# Altium PCB PCB2.PcbDoc
Units mil, origin at the board's own origin, x right, y up, seen from the top; angles counter-clockwise.
Board outline 6000 x 4000 mil, 2 copper layers (Top Layer, Bottom Layer); 73 components, 37 nets, 188 pads, 24 vias.
Unrouted connection lines stored in the file: 137.
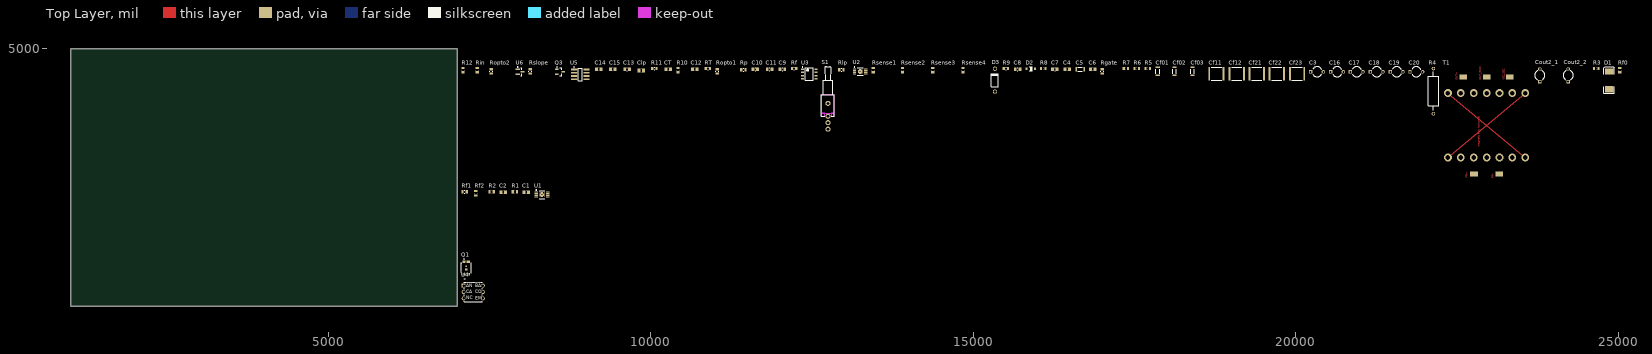
[diagram p0: Top Layer view]
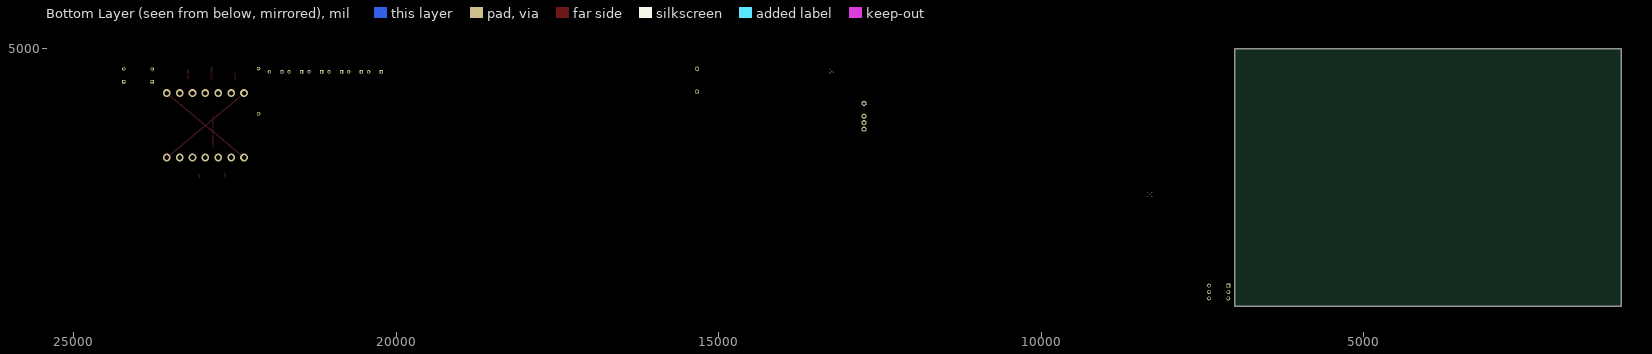
[diagram p1: Bottom Layer view, seen from below]

## Layer stack, top to bottom
Top Solder: solder mask 0.4, Solder Resist, Dk 3.5
Top Layer: signal copper 1.4
Dielectric 1: dielectric 12.6, FR-4, Dk 4.8
Bottom Layer: signal copper 1.4
Bottom Solder: solder mask 0.4, Solder Resist, Dk 3.5

## Board outline
1000,1000 7000,1000 7000,5000 1000,5000

## Design rules (kind name [scope] priority, off if disabled: settings)
Clearance [All] p1: gap=10 ignorepadtopadclearanceinfootprint=FALSE except(0: Arc-Hole Track-Hole SMDPad-Hole THPad-Hole Via-Hole Fill-Hole Poly-Hole Region-Hole Text-Hole)
PolygonConnect [All] p1: connectstyle=Relief reliefconductorwidth=10 reliefentries=4 polygonreliefangle="90 Angle" airgapwidth=10
RoutingVias [All] p1: holewidth=28 width=50 viastyle="Through Hole" minholewidth=28 minwidth=50 maxholewidth=28 maxwidth=50
SolderMaskExpansion [All] p1: expansion=4
Width [All] p1: maxlimit=10 minlimit=10 preferedwidth=10
30 further rules are at their usual default settings.

## Components (designator, comment, footprint, x,y, rotation, side; value= is the part's Value field where it differs from the comment)
C1 "10nF" CAPC0805(2012)145_N 8065,2770 r0 top value=82nF
C2 "100nF" CAPC0805(2012)145_N 7710,2770 r0 top value=82nF
C3 "Cap2" CAPR5-4X5 20330,4640 r0 top value=56uF
C4 "100nF" CAPC0805(2012)145_N 16455,4680 r0 top value=82nF
C5 "1uF" CAPC3216X180X20LL20 16655,4680 r0 top
C6 "100nF" CAPC0805(2012)145_N 16850,4680 r0 top value=82nF
C7 "10nF" CAPC0805(2012)145_N 16265,4680 r0 top value=82nF
C8 "22nF" CAPC0805(2012)145_N 15685,4680 r0 top value=82nF
C9 "100pF" CAPC0805(2012)145_N 12040,4680 r0 top value=82nF
C10 "100nF" CAPC0805(2012)145_N 11620,4680 r0 top value=82nF
C11 "100nF" CAPC0805(2012)145_N 11840,4680 r0 top value=82nF
C12 "20nF" CAPC0805(2012)145_N 10680,4680 r0 top value=82nF
C13 "100nF" CAPC0805(2012)145_N 9630,4680 r0 top value=82nF
C14 "10uF" CAPC0805(2012)145_N 9190,4680 r0 top value=82nF
C15 "100nF" CAPC0805(2012)145_N 9410,4680 r0 top value=82nF
C16 "Cap2" CAPR5-4X5 20640,4640 r0 top value=56uF
C17 "Cap2" CAPR5-4X5 20945,4640 r0 top value=56uF
C18 "Cap2" CAPR5-4X5 21255,4640 r0 top value=56uF
C19 "Cap2" CAPR5-4X5 21565,4640 r0 top value=56uF
C20 "Cap2" CAPR5-4X5 21870,4640 r0 top value=56uF
Cf01 "1uF" CAPC3216X180X20LL20 17860,4645 r90 top
Cf02 "1uF" CAPC3216X180X20LL20 18120,4645 r90 top
Cf03 "1uF" CAPC3216X180X20LL20 18400,4645 r90 top
Cf11 "10uF" CAPC5750X250X20LL40 18770,4610 r0 top
Cf12 "10uF" CAPC5750X250X20LL40 19085,4610 r0 top
Cf21 "10uF" CAPC5750X250X20LL40 19395,4610 r0 top
Cf22 "10uF" CAPC5750X250X20LL40 19705,4610 r0 top
Cf23 "10uF" CAPC5750X250X20LL40 20020,4610 r0 top
Clp "50pF" CAPC0805(2012)145_N 9850,4660 r0 top value=82nF
Cout2_1 "Cap2" CAPR5-4X5 23785,4585 r90 top value=56uF
Cout2_2 "" CAPR5-4X5 24225,4585 r90 top value=56uF
CT "17.2nF" CAPC0805(2012)145_N 10270,4680 r0 top value=82nF
D1 "CDBB5100" SMC 24860,4505 r90 top
D2 "1N4148W" JSCJ-SOD-123-2_V 15890,4685 r0 top
D3 "11 V" FAIR-DO-41-2_V 15335,4510 r90 top
Q1 "BSF450NE7NH3" INF-MG-WDSON-2-1_V 7135,1600 r0 top
Q3 "2N7002" INF-PG-SOT23_M 8590,4640 r0 top
R1 "30k" RESC0805(2012)_L 7890,2780 r0 top value="100000.00 Ohm"
R2 "2k29" RESC0805(2012)_L 7530,2780 r0 top value="100000.00 Ohm"
R3 "800k" RESC0805(2012)_L 24660,4690 r0 top value="100000.00 Ohm"
R4 "300k" AXIAL-0.7 22135,4340 r90 top value=50K
R5 "33k" RESC0805(2012)_L 17705,4690 r0 top value="100000.00 Ohm"
R6 "3M" RESC0805(2012)_L 17535,4690 r0 top value="100000.00 Ohm"
R7 "5k69" RESC0805(2012)_L 17365,4690 r0 top value="100000.00 Ohm"
R8 "30k" RESC0805(2012)_L 16085,4690 r0 top value="100000.00 Ohm"
R9 "1M" RESC0805(2012)_L 15505,4690 r0 top value="100000.00 Ohm"
R10 "160k" RESC0805(2012)_L 10420,4665 r90 top value="100000.00 Ohm"
R11 "30k" RESC0805(2012)_L 10055,4690 r0 top value="100000.00 Ohm"
R12 "423R" RESC0805(2012)_L 7085,4665 r90 top value="100000.00 Ohm"
Rf "50k" RESC0805(2012)_L 12220,4690 r0 top value="100000.00 Ohm"
Rf0 "6R4" RESC0805(2012)_L 25025,4665 r90 top value="6.4 Ohm"
Rf1 "2R" RESC0805(2012)_L 7110,2780 r0 top value="100000.00 Ohm"
Rf2 "870m" RESC0805(2012)_L 7285,2755 r90 top value="100000.00 Ohm"
Rgate "10R" RESC0805(2012)_L 17000,4645 r90 top value="100000.00 Ohm"
Rin "50k" RESC0805(2012)_L 7305,4665 r90 top value="100000.00 Ohm"
Rlp "10k" RESC0805(2012)_L 12955,4670 r0 top value="100000.00 Ohm"
Ropto1 "10k" RESC0805(2012)_L 11030,4645 r90 top value="100000.00 Ohm"
Ropto2 "10k" RESC0805(2012)_L 7525,4645 r90 top value="100000.00 Ohm"
Rp "Not Populated" RESC0805(2012)_L 11435,4670 r0 top value="100000.00 Ohm"
Rsense1 "200m" RESC0805(2012)_L 13450,4665 r90 top value="100000.00 Ohm"
Rsense2 "200m" RESC0805(2012)_L 13900,4665 r90 top value="100000.00 Ohm"
Rsense3 "200m" RESC0805(2012)_L 14370,4665 r90 top value="100000.00 Ohm"
Rsense4 "200m" RESC0805(2012)_L 14840,4665 r90 top value="100000.00 Ohm"
Rslope "24.3k" RESC0805(2012)_L 8130,4645 r90 top value="100000.00 Ohm"
RT "1k" RESC0805(2012)_L 10885,4690 r0 top value="100000.00 Ohm"
S1 "SW-SPDT" TL36WW15050 12745,3950 r90 top
T1 "ETD 29/16/10, Turns ratio 30:13:22" "ETD 29/16/10 v2" 22960,3810 r0 top
U1 "Lin v.reg TPS79801-Q1" DGN0008B_N 8310,2735 r0 top
U2 "Lin v.reg TPS79801-Q1" DGN0008B_N 13245,4645 r0 top
U3 "UC3842AD8TR" D0008A_L 12455,4605 r0 top
U4 "4N35(SHORT)" 4N35 7395,1125 r0 top value=Value
U5 "LM293D" D0008A_M 8905,4600 r0 top
U6 "TLVH431IDBZT" TI-DBZ3_N 7970,4640 r0 top

## Footprints (in the part's own frame and the unit in brackets; to place one, negate y for a bottom-side part, rotate by r counter-clockwise, add the part's x,y. Pads: shape width x height; smd on the part's side, far side on the other; paste and mask are expansions set on the pad)
4N35 [mil]
  rect 59x59 / inner round 60 / far side rect 59x59 hole 39 paste+0 mask+0: 1(-300,200)
  round 59 / inner round 60 / far side round 59 hole 39 paste+0 mask+0: 2(-300,100) 3(-300,0) 4(0,0) 5(0,100) 6(0,200)
  silkscreen extent -286,-50 -14,250, body extent 0,0 10,10, height 10
AXIAL-0.7 [mm] "Axial Device, Thru-Hole; 2 Leads; 0.7 in Pin Spacing"
  round 1.4 hole 0.85: 1(-8.89,0) 2(8.89,0)
  silkscreen extent -7.62,-2.03 7.62,2.03
CAPC0805(2012)145_N [mm] "Chip Capacitor, Body 2.0x1.2mm, Height 1.45mm, IPC Medium Density"
  rect 1.15x1.45 smd: 1(-0.9,0) 2(0.9,0)
  silkscreen extent -0.05,-0.62 0.05,0.63, body extent -1.1,-0.72 1.1,0.73, height 1.45
CAPC3216X180X20LL20 [mm] "Chip Capacitor, 2-Leads, Body 3.40x1.80mm, IPC High Density"
  rect 0.55x1.7 smd: 1(-1.575,0) 2(1.575,0)
  silkscreen extent -0.9,-0.75 0.9,0.75, body extent -1.7,-0.9 1.7,0.9, height 1.8
CAPC5750X250X20LL40 [mm] "Chip Capacitor, 2-Leads, Body 6.1x5.4mm, IPC High Density"
  rect 0.75x5.3 smd: 1(-2.825,0) 2(2.825,0)
  silkscreen extent -2.05,-2.55 2.05,2.55, body extent -3.05,-2.7 3.05,2.7, height 2.5
CAPR5-4X5 [mm] "Capacitor; 2 Leads"
  rect 1.35x1.35 hole 0.8: 1(-2.5,0)
  round 1.35 hole 0.8: 2(2.5,0)
  silkscreen extent -1.69,-2 1.82,2
D0008A_L [mm] "SOIC, 8-Leads, Body 5x4mm, Pitch 1.27mm, IPC High Density"
  rrect18% 1.25x0.55 smd: 1(-2.625,1.905) 2(-2.625,0.635) 3(-2.625,-0.635) 4(-2.625,-1.905) 5(2.625,-1.905) 6(2.625,-0.635) 7(2.625,0.635) 8(2.625,1.905)
  silkscreen extent -2.75,-2.5 1.6,2.85, body extent -3,-2.45 3,2.45, height 1.63
D0008A_M [mm] "SOIC, 8-Leads, Body 5x4mm, Pitch 1.27mm, IPC Low Density"
  oval 2.5x0.7 smd: 1(-2.45,1.905) 2(-2.45,0.635) 3(-2.45,-0.635) 4(-2.45,-1.905) 5(2.45,-1.905) 6(2.45,-0.635) 7(2.45,0.635) 8(2.45,1.905)
  silkscreen extent -2.57,-2.5 0.8,2.93, body extent -2,-2.5 2,2.5, height 1.75
DGN0008B_N [mm] "TSOP, 8-Leads, Body 3.1x3.1mm, Pitch 0.65mm, Thermal Pad 1.98x1.88mm, IPC Medium Density"
  rrect22% 1.35x0.45 smd: 1(-2.225,0.975) 2(-2.225,0.325) 3(-2.225,-0.325) 4(-2.225,-0.975) 5(2.225,-0.975) 6(2.225,-0.325) 7(2.225,0.325) 8(2.225,0.975)
  rrect5% 1.88x1.98 smd: 9(0,0)
  silkscreen extent -2.35,-1.55 1.15,1.9, body extent -2.45,-1.5 2.45,1.5, height 0.94
"ETD 29/16/10 v2" [mm]
  rect 3x2 smd: 1(-5,-19.111) 2(5,-19.111) 4(-9.144,19.05) 5(0,19.05) 6(9.144,19.05)
  rect 1x1 smd paste+0 mask+0.102: 3(-0.635,19.05)
  Top Layer lines w0.05: -15.24,-12.7 15.24,12.7 ; -15.24,12.7 15.24,-12.7
  body extent -17.6,-17.5 17.6,17.6, height 25
FAIR-DO-41-2_V [mm] "2-Leads, Axial leaded, Body 2.72x5.2mm, Pin Spacing 9mm"
  round 1.65 hole 1.15: 1(-4.5,0) 2(4.5,0)
  silkscreen extent -2.6,-1.36 2.6,1.36, body extent -4.93,-1.36 4.93,1.36, height 2.71
INF-MG-WDSON-2-1_V [mm] "WDSON, 6-Leads, Body 4.015x3.825mm"
  rect 1.25x0.9 smd: 1(-0.825,2.41) 2(0.825,2.41) 3(0.825,-2.505) 4(-0.825,-2.505)
  rect 0.65x0.65 smd: 5(0,0.65)
  rect 0.9x0.7 smd: 6(0,-0.675)
  silkscreen extent -1.91,-2.01 1.91,3.53, body extent -1.91,-2.01 1.91,2.01, height 0.7
INF-PG-SOT23_M [mm] "SOT23, 3-Leads, Body 2.9x1.3mm, Pitch 0.95mm, IPC Low Density"
  rect 1.35x0.6 smd: 1(-1.2,0.95) 2(-1.2,-0.95) 3(1.2,0)
  silkscreen extent -1.32,-1.5 0.7,1.92, body extent -0.7,-1.5 0.7,1.5, height 1.1
JSCJ-SOD-123-2_V [mm] "SMD, 2-Leads, Body 2.7x1.6mm, Height 1.25mm"
  rect 0.8x1 smd: 1(-1.62,0) 2(1.62,0)
  silkscreen extent -0.5,-0.8 0.6,0.8, body extent -1.35,-0.8 1.35,0.8, height 1.25
RESC0805(2012)_L [mm] "Chip Resistor, Body 2.0x1.3mm, IPC High Density"
  rect 0.85x1.3 smd: 1(-0.85,0) 2(0.85,0)
  silkscreen extent -0.05,-0.55 0.05,0.55, body extent -1.1,-0.67 1.1,0.68, height 0.7
SMC [mm] "DO-214-AB/SMC; 2 C-Bend Leads; Body 7.9 x 5.9 mm, inc. leads (LxW)"
  rect 2.4x3.3 smd: 1(-3.475,0) 2(3.475,0)
  silkscreen extent -5.07,-2.05 5.43,2.05
TI-DBZ3_N [mm] "SOT23, 3-Leads, Body 2.92x1.3 mm, Pitch 0.95 mm, IPC Medium Density"
  rect 1.6x0.6 smd: 1(-0.9,0.95) 2(-0.9,-0.95) 3(0.9,0)
  silkscreen extent -1.02,-1.5 0.7,1.92, body extent -0.7,-1.52 0.7,1.52, height 1.12
TL36WW15050 [mm] "Switch; 4 Leads"
  round 2 hole 1.1: 1(0,0) 2(-2.54,0) 3(-5.08,0) M(5.08,0)
  Top Layer keep-out region: 0,-1.27 0,-2.54 1.27,-2.54 1.27,-1.27
  Top Layer keep-out region: 0,2.54 0,1.27 1.27,1.27 1.27,2.54
  Top Layer keep-out region: 1.27,2.54 1.27,-2.54 8.509,-2.54 8.509,2.54
  silkscreen extent 0,-2.54 19.56,2.54

## Part data
C1 C2 C14 C15: library part CMP-1036-04379-1, "CAP 82nF", Case-EIA=0805, Case-Metric=2012, Rated Voltage="50 V", Tolerance=±10%, Max Thickness="1.45 mm", Technology=SMT
C3 C16 C17 C18 C19 C20 Cout2_1: "Capacitor", Voltage - Rated="50 V", PackageDescription="Capacitor; 2 Leads", PackageReference=CAPR5-4X5, Published=23-Sep-2002, Publisher="Altium Limited"
C4: library part CMP-1036-04379-1, "footprint not correct", Case-EIA=0805, Case-Metric=2012, Rated Voltage=100V, Tolerance=±10%, Max Thickness="1.45 mm", Technology=SMT
C5 Cf01 Cf02 Cf03: library part CMP-2000-06049-1, "Chip Capacitor, 1 uF, +/- 10%, 100 V, -55 to 125 degC, 1206 (3216 Metric), RoHS, Tape and Reel", Capacitance=1µF, Manufacturer=TDK, Operating Temperature=-55°C~125°C, Package / Case=1206(3216Metric), Package Description="2-Pin Surface Mount Device, Body 3.2 x 1.6 mm", Package Reference=1206, PCN Part Number=MLCCPartNumberChange30/Nov/2012, Ratings=-, Standard Package=1, Temperature Coefficient=X7R, Tolerance=±10%, Voltage - Rated=100V, Applications=GeneralPurpose, Catalog Drawings=CSERIES_1206_1.8, Category=Capacitors, Datasheet URL=http://www.farnell.com/datasheets/1484596.pdf, Datasheet Version=08/2011, Family=CeramicCapacitors, Featured Product=C-SeriesMidVoltageMLCCs, Features=-, Height - Seated (Max)=-, Kits=SAMPLEKIT1008-ND-KITCAPCERMLCC100V-630V, Lead Spacing=-, Lead Style=-, Manufacturer URL=http://www.tdk.com/, Mounting Technology=SurfaceMount, Mounting Type=SurfaceMount,MLCC, Online Catalog=CSeries,MidVoltage, Other Names=445-4467-1, Package URL=https://product.tdk.com/info/en/documents/chara_sheet/C3216X7R1V106K160AC.pdf, Packaging=CutTape(CT), Product Training Modules=SEAT,CCV,andTVCLDesignToolsGuidetoReplacinganElectrolyticCapacitorwithanMLCC, RoHS Information=RoHSCertificate-MLCC, Series=C
C6 C9 C10 C11 C12: library part CMP-1036-04379-1, "CAP 82nF", Case-EIA=0805, Case-Metric=2012, Rated Voltage="30 V", Tolerance=±10%, Max Thickness="1.45 mm", Technology=SMT
C7 CT: library part CMP-1036-04379-1, "CAP 82nF", Case-EIA=0805, Case-Metric=2012, Rated Voltage=30V, Tolerance=±10%, Max Thickness="1.45 mm", Technology=SMT
C8: library part CMP-1036-04379-1, "CAP 82nF", Case-EIA=0805, Case-Metric=2012, Rated Voltage=50V, Tolerance=±10%, Max Thickness="1.45 mm", Technology=SMT
C13 Clp: library part CMP-1036-04379-1, "CAP 82nF", Case-EIA=0805, Case-Metric=2012, Rated Voltage=15V, Tolerance=±10%, Max Thickness="1.45 mm", Technology=SMT
Cf11 Cf12 Cf21 Cf22 Cf23: library part CMP-2000-07445-1, "Chip Capacitor, 10 uF, +/- 10%, 100 V, -55 to 125 degC, 2220 (5750 Metric), RoHS, Tape and Reel", Manufacturer=TDK, Package Description="2-Pin Surface Mount Device, Body 5.7 x 5 mm", Package Reference=2220, Voltage - Rated=100V, Datasheet URL=https://product.tdk.com/info/en/catalog/datasheets/mlcc_automotive_midvoltage_en.pdf, Datasheet Version=03/2015, Manufacturer URL=http://www.tdk.com/, Mounting Technology=SurfaceMount
Cout2_2: library part Cap2, "Capacitor", Voltage - Rated="50 V", PackageDescription="Capacitor; 2 Leads", PackageReference=CAPR5-4X5, Published=23-Sep-2002, Publisher="Altium Limited"
D1: library part Diode, "Default Diode", Code_JEDEC=DO-214-AB, LatestRevisionDate=17-Jul-2002, LatestRevisionNote="Re-released for DXP Platform.", PackageDescription="DO-214-AB/SMC; 2 C-Bend Leads; Body 7.9 x 5.9 mm, inc. leads (LxW)", PackageReference=SMC, PackageVersion=Sep-1996, Published=8-Jun-2000, Publisher="Altium Limited"
D2: library part CMP-0914-00001-1, "Fast Switching Diode, 75 V, 150 mA, 2-Pin 2.7 x 1.6 x 1.25 mm SMD, Tape and Reel", Manufacturer="Changjiang Electronics", ComponentLink1Description="Manufacturer URL", ComponentLink1URL=http://www.cj-elec.com/, ComponentLink2Description=Datasheet, ComponentLink2URL=http://www.cj-elec.com/txUpfile/20121613352740313.pdf, ComponentLink3Description="Package Specification", ComponentLink3URL=http://www.cj-elec.com/txUpfile/201412112231195145.pdf, DatasheetVersion="Rev. A", IO (mA)=150, IR (uA)=1, Mounting Technology="Surface Mount", PackageDescription="2-Pin SMD, Body 2.7 x 1.6 mm, Height 1.25 mm", PackageReference=SOD-123-2, PackageVersion="Rev. A", Packing="Tape and Reel", PartNumber=1N4148W, PD (mW)=350, Trr (ns)=4, TSTG (degC)="-55 to 150", VF (V)=1.25, VR (V)=75
D3: library part CMP-0892-00002-1, "Zener Diode, 11V, 1W, 5%, -65 to 200 degC, 2-Pin DO-41, Body 2.72 x 5.2 mm, RoHS", Manufacturer="Fairchild Semiconductor", Operating and Storage Temperature Range="-65 to 200 degC", PartNumber=1N4741A, Test Current IZ (mA)=23, Tolerance=5%, ComponentLink1Description="Manufacturer URL", ComponentLink1URL=http://www.fairchildsemi.com/, ComponentLink2Description=Datasheet, ComponentLink2URL=http://www.fairchildsemi.com/ds/1N/1N4744A.pdf, ComponentLink3Description="Package Specification", ComponentLink3URL=http://www.fairchildsemi.com/dwg/DO/DO41A.pdf, DatasheetVersion="Rev. H3", IR (uA)=5, Mounting Technology="Through Hole", PackageDescription="2-Pin Axial leaded, Body 2.72 x 5.2 mm, Lead Spread 25.4 mm", PackageReference=DO-41-2, PackageVersion="Rev. 2", PD (W)=1, RoHS=TRUE, VZ (Max.) (V)=11.55, VZ (Min.) (V)=10.45, ZZ (Max) (ohm)=7
Q1: library part CMP-1091-00001-1, "N-Channel OptiMOS 3 Power-MOSFET, 75 V VDS, 15 A ID, -40 to 150 degC, MG-WDSON-2-1, Reel, Green", Manufacturer=Infineon, ComponentLink1Description="Manufacturer URL", ComponentLink1URL=http://www.infineon.com/, ComponentLink2Description=Datasheet, ComponentLink2URL=http://www.infineon.com/dgdl/BSF450NE7NH3G_rev2.pdf?folderId=db3a304313b8b5a60113cee8763b02d7&fileId=db3a30433a047ba0013a687e2ae403da, ComponentLink3Description="Package Specification", ComponentLink3URL=http://www.infineon.com/dgdl/BSF450NE7NH3G_rev2.0.pdf?folderId=db3a304313b8b5a60113cee8763b02d7&fileId=db3a30433a047ba0013a687e2ae403da, DatasheetVersion="Rev. 2.0", Green=TRUE, Halogen-free=TRUE, ID (max)="15 A", IDpuls (max)="60 A", Mounting Technology="Surface Mount", PackageDescription="6-Pin Metal Green Very Very Thin Profile Dual Small Outline Non-Leaded Package", PackageReference=MG-WDSON-2-1, PackageVersion="Rev. 02, 05/2009", Packing=Reel, PartNumber=BSF450NE7NH3, Polarity=N, Ptot (max)="18 W", QG="6 nC", RDS (on) (max)="45 mOhm", Rth="7 K/W", RthJA (max)="58 K/W", RthJC (max)="7 K/W", VDS (max)="75 V", VGS(th) (max)="3.5 V", VGS(th) (min)="2.3 V"
Q3: library part CMP-1149-00026-1, "N-Channel OptiMOS Small-Signal-Transistor, 60 V VDS, 0.3 A ID, -55 to 150 degC, PG-SOT23, Reel, Green", Manufacturer=Infineon, ComponentLink1Description="Manufacturer URL", ComponentLink1URL=http://www.infineon.com/, ComponentLink2Description=Datasheet, ComponentLink2URL=http://www.infineon.com/dgdl/2N7002_Rev2.4.pdf?folderId=db3a3043156fd573011622e10b5c1f67&fileId=db3a304319bc939a0119c2a9461e79e6, ComponentLink3Description="Package Specification", ComponentLink3URL=http://www.infineon.com/dgdl/SOT23-Package_Overview.pdf?folderId=db3a30431936bc4b0119532290053c66&fileId=db3a30431936bc4b0119533468123c85, DatasheetVersion="Rev. 2.4", Green=TRUE, Halogen-free=TRUE, ID (max)="0.3 A", IDpuls (max)="1.2 A", Mounting Technology="Surface Mount", PackageDescription="3-Pin Small Outline Transistor Package, 2.9 x 1.3 mm Body, 0.95 mm Pitch", PackageReference=PG-SOT23, PackageVersion=Apr-08, Packing=Reel, PartNumber=2N7002, Ptot (max)="0.5 W", QG="0.4 nC", RDS (on) (max)="3,000 mOhm", RDS (on) (max) (@4.5V)="4,000 mOhm", RthJA (max)="250 K/W", VDS (max)="60 V", VGS(th) (max)="2.5 V", VGS(th) (min)="1.5 V"
R1 R2 R3 R5 R6 R7 R8 R9 R10 R11 R12 Rf Rf0 Rf1 Rf2 Rgate Rin Rlp Ropto1 Ropto2 Rslope RT: library part CMP-1013-00736-1, Case-EIA=0805, Case-Metric=2012, Power="0.125 W", Tolerance="1 %", Technology=SMT
R4: library part "Res Adj1", "Variable Resistor", LatestRevisionDate=17-Jul-2002, LatestRevisionNote="Re-released for DXP Platform.", PackageDescription="Axial Device, Thru-Hole; 2 Leads; 0.7 in Pin Spacing", PackageReference=AXIAL-0.7, Published=8-Jun-2000, Publisher="Altium Limited", Set Position=0.5
Rp: library part CMP-1013-00736-1, "Biasing current sense", Case-EIA=0805, Case-Metric=2012, Power="0.125 W", Tolerance="1 %", Technology=SMT
Rsense1 Rsense2 Rsense3 Rsense4: library part CMP-1013-00736-1, "wrong footprint", Case-EIA=0805, Case-Metric=2012, Power=0.25W, Tolerance="1 %", Technology=SMT
S1: "SPDT Subminiature Toggle Switch, Right Angle Mounting, Vertical Actuation", ComponentLink1Description="Manufacturer Link", ComponentLink1URL=http://www.apem.com, DatasheetVersion=05-Dec-2000, LatestRevisionDate=17-Dec-2003, LatestRevisionNote="Schematic revised, PCB Footprint replaced.", PackageDescription="Switch; 4 Leads", PackageReference=TL36WW15050, Published=24-Mar-1999, Publisher="Altium Limited"
T1: library part Trans3, "Three-winding Transformer (Non-Ideal)"
U1 U2: library part CMP-0394-01260-2, "got this footprint from a similar model", Manufacturer="Texas Instruments", PartNumber=TPS79801QDGNRQ1, Accuracy(%)=1.5, Code_JEDEC=MO-187, ComponentLink1Description="Manufacturer URL", ComponentLink1URL=http://www.ti.com/, ComponentLink2Description=Datasheet, ComponentLink2URL=http://www.ti.com/general/docs/lit/getliterature.tsp?genericPartNumber=TPS79801-Q1&fileType=pdf, ComponentLink3Description="Package Specification", ComponentLink3URL=http://www.ti.com/litv/pdf/mpds046e, DatasheetVersion=SLVS822D, Eco-Plan="Green (RoHS & no Sb/Br)", Iout(Max)(A)=0.05, Iq(Typ)(mA)=0.04, Mounting Technology="Surface Mount", PackageDescription="8-Pin Plastic Small Outline, Body 3 x 3 mm, Pitch 0.65 mm", PackageReference=DGN0008B, PackageVersion=4073271/F, SubFamily="Single Channel LDO", Vdo(Typ)(mV)=300, Vin(Max)(V)=50, Vin(Min)(V)=3, Vout Adj(Max)(V)=28, Vout Adj(Min)(V)=1.275
U3: library part CMP-0319-00555-2, "PWM Controller with Current Control, 100 % Duty Cycle, 0 to +70 degC, 8-pin SOIC (D), Green (RoHS & no Sb/Br)", Frequency(Max)(kHz)=450, Manufacturer="Texas Instruments", Rating=Catalog, Code_JEDEC=MS-012AA, ComponentLink1Description=Datasheet, ComponentLink1URL=http://www.ti.com/general/docs/lit/getliterature.tsp?genericPartNumber=UC3842A&fileType=pdf, Control Method=Current, DatasheetVersion=SLUS224C, Duty Cycle(Max)(%)=100, Eco-Plan="Green (RoHS & no Sb/Br)", Mounting Technology="Surface Mount", PackageDescription="8-Pin Plastic Small Outline Integrated Circuit, 4.9 x 3.9 mm, Pitch 1.27 mm Pitch", PackageReference=D0008A, PackageVersion="revM, Jun-2011", PartNumber=UC3842AD8TR, Regulated Outputs(#)=1, SubFamily="PWM Controller", Topology="Boost, Buck, Flyback, Forward", UVLO Thresholds On/Off(V)=16/10
U4: "Imported", Built_By=EMA_UL_Team, C="Copyright (C) 2015 Accelerated Designs. All rights reserved", Manufacturer_Part_Number=4N35(SHORT), RefDes=RefDes, Type=Type, Vendor=Toshiba
U5: library part CMP-2100-03650-1, "Dual Differential Comparator, 2 to 30 V, -25 to 85 degC, 8-Pin SOIC (D), Green (RoHS & no Sb/Br), Tube", Case/Package=SOIC, Input Bias Current=250nA, Input Offset Voltage (Vos)=5mV, Manufacturer="Texas Instruments", Max Dual Supply Voltage=18V, Max Operating Temperature=85degC, Max Supply Current=500uA, Max Supply Voltage=36V, Min Dual Supply Voltage=1V, Min Operating Temperature=-25degC, Min Supply Voltage=2V, Nominal Supply Current=1mA, Output Current=20mA, Output Current per Channel=6mA, Package Description="8-Pin Small Outline Integrated Circuit, Body 4.9 x 3.9 mm, Pitch 1.27 mm", Package Quantity=75, Package Reference=D0008A, Package Version="4040047-3/M, 06/2011", Quiescent Current=2.5mA, Supply Voltage=28V, Voltage Gain=106.02dB, Datasheet URL=http://www.ti.com/general/docs/lit/getliterature.tsp?genericPartNumber=LM293&fileType=pdf, Datasheet Version="SLCS005Y, 06/2015", Height=1.58mm, Lead Free=LeadFree, Length=4.9mm, Manufacturer URL=http://www.ti.com/, Max Input Current=250nA, Mount=SurfaceMount, Number of Channels=2, Number of Elements=2, Number of Pins=8, Package URL=http://www.ti.com/lit/ml/msoi002j/msoi002j.pdf, Packaging=Rail/Tube, PartId=1, Radiation Hardening=No, REACH SVHC=NoSVHC, RoHSCompliant=true, Weight=0.002561oz, Width=3.91mm
U6: library part CMP-0366-00941-1, "Low-Voltage Adjustable Precision Shunt Regulator, 80 mA, -40 to 85 degC, 3-pin SOT-23 (DBZ), Green (RoHS & no Sb/Br)", Manufacturer="Texas Instruments", Rating=Catalog, Temp Coeff(Max)(ppm/ degree C)=129, Code_JEDEC=TO-236, ComponentLink1Description="Manufacturer URL", ComponentLink1URL=http://www.ti.com/, ComponentLink2Description=Datasheet, ComponentLink2URL=http://www.ti.com/general/docs/lit/getliterature.tsp?genericPartNumber=TLVH431&fileType=pdf, ComponentLink3Description="Package Specification", ComponentLink3URL=http://www.ti.com/litv/pdf/mpds108a, DatasheetVersion=SLVS555I, Eco-Plan="Green (RoHS & no Sb/Br)", Initial Accuracy @ 25/deg C(%)=1.5, Iout/Iz(Max)(mA)=80, Min Iz for Regulation(uA)=80, Mounting Technology="Surface Mount", PackageDescription="3-Pin Plastic Small Outline, Body 2.92 x 1.3 mm, Pitch 0.95 mm", PackageReference=DBZ3, PackageVersion=4203227/B, PartNumber=TLVH431IDBZT, SubFamily="Shunt Voltage Reference", VO Adj(Max)(V)=18, VO Adj(Min)(V)=1.24

## Via types
v1: diameter 118.11, hole 70.87, Top Layer to Bottom Layer, 14 vias
v2: diameter 19.68, hole 7.87, Top Layer to Bottom Layer, 10 vias

## Nets (pads, with @x,y where several pads share a name; then routed paths per layer and width w, separated by ;. In a path a pad name is that pad's centre, name@x,y a point inside that pad or via, vN(x,y) a via of type N, cw(c..) or ccw(c..) an arc to the next point about the centre after c; other vN are vias at no path point)
GND-PRI: C2.1 C10.1 C13.2 C14.1 C15.1 Cf01.1 Cf02.1 Cf03.1 Cf11.1 Cf12.1 Cf21.1 Cf22.1 Cf23.1 Clp.1 CT.2 D3.1 Q3.2 R2.1 R12.2 Ropto2.1 Rsense1.1 Rsense2.1 Rsense3.1 Rsense4.1 S1.3 U1.4 U1.9 U3.5 U5.4
  other v2: 8282.83,2705.87 8337.17,2705.87 8310,2735 8282.83,2764.13 8337.17,2764.13
GND-SEC: C3.2 C4.2 C5.2 C6.2 C11.1 C16.2 C17.2 C18.2 C19.2 C20.2 Cout2_1.2 Cout2_2.2 R5.1 R7.1 T1.3 T1.5 U2.4 U2.9 U6.3
  other v2: 13217.83,4615.87 13272.17,4615.87 13245,4645 13217.83,4674.13 13272.17,4674.13
IN+: R6.2 Rf0.2 U1.5 U1.8
IN-: C8.1 R9.1
NetC1_1: C1.1 R1.1 R2.2 U1.2
NetC3_1: C3.1 C16.1 C17.1 C18.1 C19.1 C20.1 D1.2
NetC4_1: C4.1 C5.1 D2.2 U2.5 U2.8
NetC7_2: C7.2 R7.2 R8.1 U2.2
NetC8_2: C8.2 D3.2 R6.1 R9.2
NetC9_1: C9.1 C12.1 U4.2 U6.2
NetC9_2: C9.2 R3.1 R4.1 R10.1 U6.1
NetC12_2: C12.2 R10.2
NetC13_1: C13.1 Rp.1 RT.2 U3.8
NetCf01_2: Cf01.2 Cf02.2 Cf03.2 Rf1.2
NetCf11_2: Cf11.2 Cf12.2 Rf2.2
NetCf21_2: Cf21.2 Cf22.2 Cf23.2 T1.1
NetCT_1: CT.1 Rslope.1 RT.1 U3.4
NetD1_1: D1.1 T1.4
NetD2_1: D2.1 T1.6
NetLb0_1: Rf0.1
NetLb1_1: Rf1.1
NetLb2_1: Rf2.1
NetQ1_1: Q1.1 Q1.2 Q1.3 Q1.4 T1.2
NetQ1_5: Q1.5 Rgate.1
NetQ1_6: Q1.6 Rlp.1 Rsense1.2 Rsense2.2 Rsense3.2 Rsense4.2
NetQ3_1: Q3.1 U5.1
NetQ3_3: Q3.3 Rf.1 S1.2 U3.1
NetR4_2: R4.2 R5.2
NetR11_1: R11.1 R12.1 U5.2
NetRf_2: Rf.2 Rin.2 Rslope.2 U3.2
NetRgate_2: Rgate.2 U3.6
NetRin_1: Rin.1 Ropto2.2 U4.4
NetRopto1_2: Ropto1.2 U4.1
OUT: Cout2_1.1 Cout2_2.1 R3.2
VCC-PRI: C1.2 C2.2 C10.2 C14.2 C15.2 R1.2 R11.2 U1.1 U3.7 U4.5 U5.8
VCC-SEC: C6.1 C7.1 C11.2 R8.2 Ropto1.1 U2.1
Vshunt: Clp.2 Rlp.2 Rp.2 U3.3 U5.3
pads on no net: S1.1 S1.M U1.3 U1.6 U1.7 U2.3 U2.6 U2.7 U4.3 U4.6 U5.5 U5.6 U5.7
copper on no net:
  other v1: 22360,3310 22560,3310 22760,3310 22960,3310 23160,3310 23360,3310 23560,3310 22360,4310 22560,4310 22760,4310 22960,4310 23160,4310 23360,4310 23560,4310

## Text inside footprints (layer, text, board x,y; h text height)
T1: Top Layer "PRI-" at 23070,2985 h29.53 r90; Top Layer "PRI+" at 22670,2995 h29.53 r90; Top Layer "magnetic axis horizontal" at 22850,3480 h29.53 r90; Top Layer "OUT+" at 22510,4520 h29.53 r90; Top Layer "OUT_GND" at 22875,4515 h29.53 r90; Top Layer "VCC_SEC" at 23240,4520 h29.53 r90
U4: Top Overlay "EM" at 7275,1105 h50; Top Overlay "CO" at 7275,1205 h50; Top Overlay "BA" at 7275,1295 h50; Top Overlay "NC" at 7135,1110 h50; Top Overlay "CA" at 7135,1205 h50; Top Overlay "AN" at 7135,1300 h50; Top Overlay "*" at 7095,1384.5 h50; Mechanical 13 "*" at 7124,1325 h50